# Altium PCB LV Terminal Board.PcbDoc
Units mm, origin at the board's own origin, x right, y up, seen from the top; angles counter-clockwise.
Board outline 138 x 33 mm, 2 copper layers (Top Layer, Bottom Layer); 17 components, 16 nets, 36 pads, 14 vias.
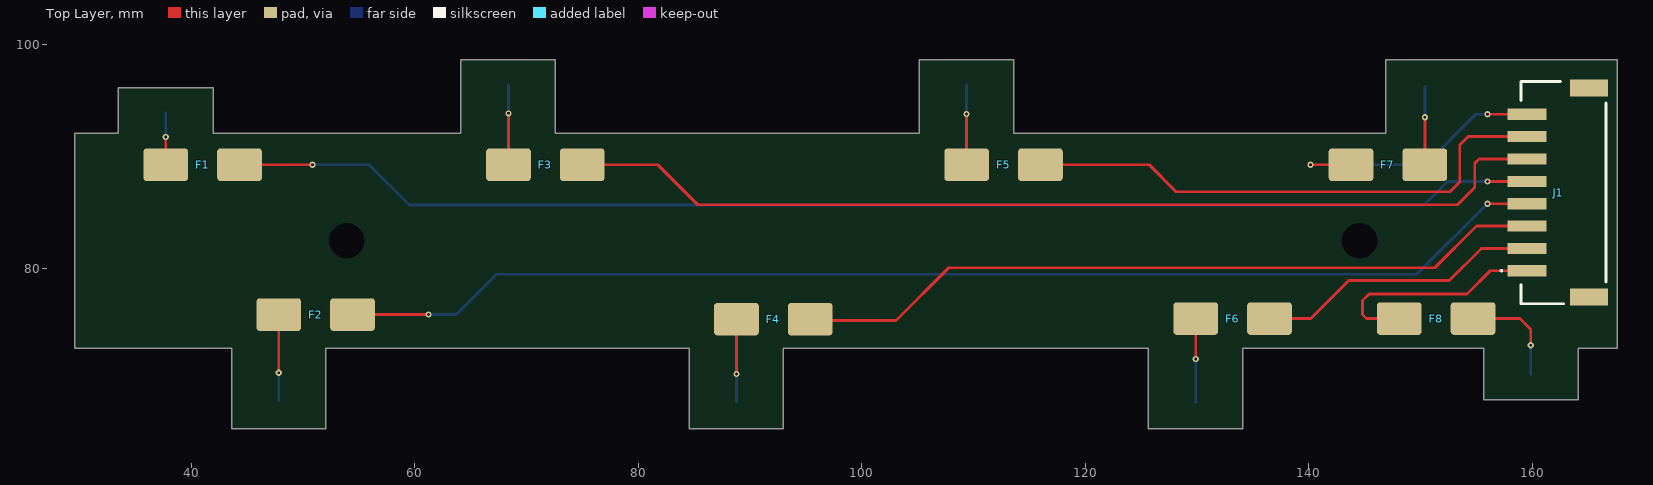
[diagram p0: Top Layer view]
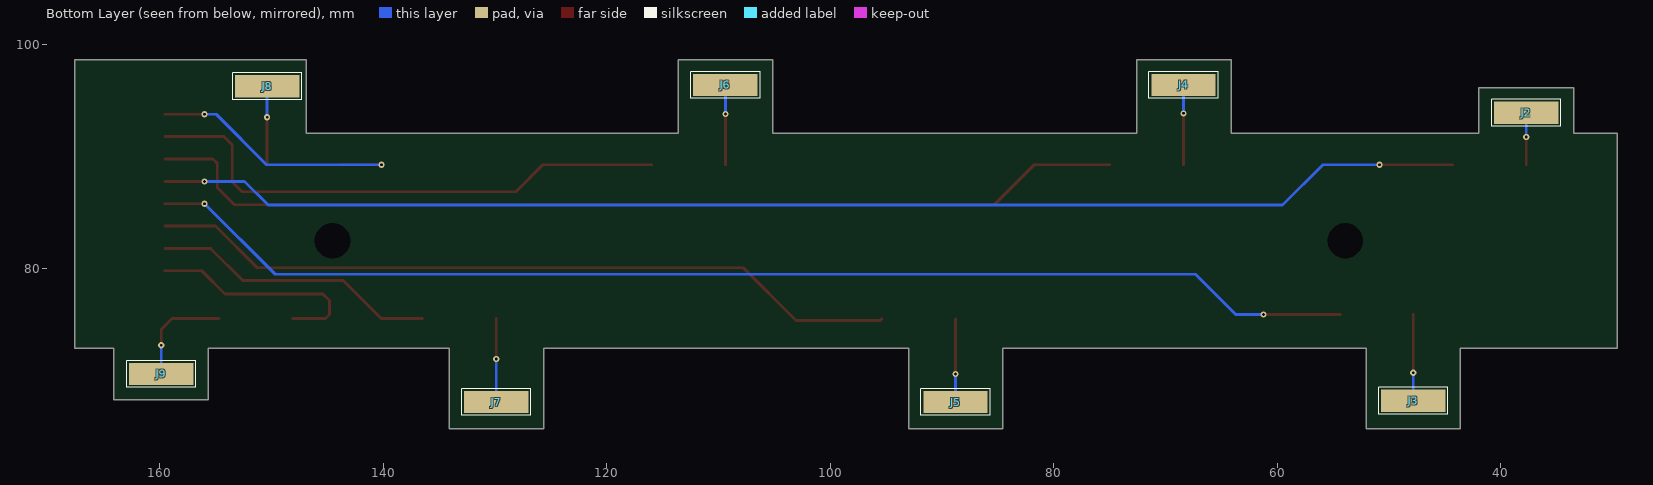
[diagram p1: Bottom Layer view, seen from below]
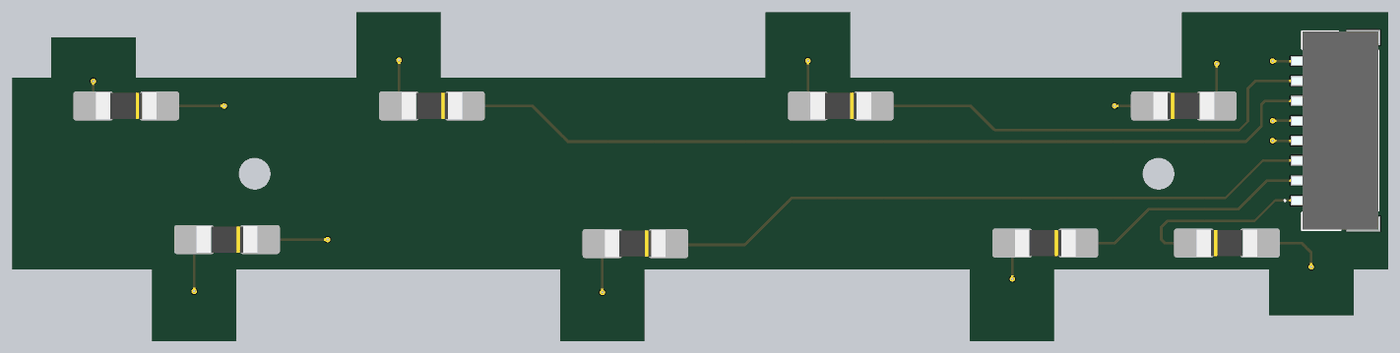
[diagram p2: 3D render of the assembled board from above, using the file's embedded part models]

## Layer stack, top to bottom
Top Solder: solder mask 0.0102, Solder Resist, Dk 3.5
Top Layer: signal copper 0.0356
Dielectric 1: dielectric 0.32, FR-4, Dk 4.8
Bottom Layer: signal copper 0.0356
Bottom Solder: solder mask 0.0102, Solder Resist, Dk 3.5

## Board outline
29.604,72.839 43.637,72.839 43.637,65.646 52.07,65.646 52.07,72.839 84.582,72.839 84.582,65.646 92.989,65.646 92.989,72.839 125.628,72.839 125.628,65.646 134.087,65.646 134.087,72.839 155.651,72.839 155.651,68.232 164.135,68.232 164.135,72.839 167.604,72.839 167.604,98.646 146.904,98.646 146.904,92.074 113.614,92.074 113.614,98.646 105.156,98.646 105.156,92.074 72.568,92.074 72.568,98.646 64.135,98.646 64.135,92.074 42.012,92.074 42.012,96.146 33.503,96.146 33.503,92.074 29.604,92.074

## Design rules (kind name [scope] priority, off if disabled: settings)
Clearance [All] p1: gap=0.254 ignorepadtopadclearanceinfootprint=FALSE
PolygonConnect [All] p1: connectstyle=Relief reliefconductorwidth=0.254 reliefentries=4 polygonreliefangle="90 Angle" airgapwidth=0.254
RoutingVias [All] p1: holewidth=0.711 width=1.27 viastyle="Through Hole" minholewidth=0.711 minwidth=1.27 maxholewidth=0.711 maxwidth=1.27
SolderMaskExpansion [All] p1: expansion=0.102 istentingtop=FALSE
Width [All] p1: maxlimit=0.254 minlimit=0.254 preferedwidth=0.254
30 further rules are at their usual default settings.

## Classes and differential pairs
component class Toplevel: F1 F2 F3 F4 F5 F6 F7 F8 J1 J2 J5 J7 J8 J9

## Components (designator, comment, footprint, x,y, rotation, side; value= is the part's Value field where it differs from the comment)
F1 "0154.750MRL" 0451Series_LTF 41.044,89.256 r180 top
F2 "0154.750MRL" 0451Series_LTF 51.154,75.844 r180 top
F3 "0154.750MRL" 0451Series_LTF 71.702,89.256 r180 top
F4 "0154.750MRL" 0451Series_LTF 92.1,75.438 r180 top
F5 "0154.750MRL" 0451Series_LTF 112.698,89.256 r180 top
F6 "0154.750MRL" 0451Series_LTF 133.196,75.489 r180 top
F7 "0154.750MRL" 0451Series_LTF 147.093,89.256 r0 top
F8 "0154.750MRL" 0451Series_LTF 151.409,75.489 r0 top
J1 "S8B-PH-SM4-TB" S8BPHSM4TB 162.789,86.766 r270 top
J2 "S9091-46R" S909146R 37.744,93.904 r0 bottom
J3 "S9091-46R" S909146R 47.854,68.148 r180 bottom
J4 "S9091-46R" S909146R 68.402,96.393 r0 bottom
J5 "S9091-46R" S909146R 88.8,68.021 r180 bottom
J6 "S9091-46R" S909146R 109.398,96.393 r180 bottom
J7 "S9091-46R" S909146R 129.896,68.021 r0 bottom
J8 "S9091-46R" S909146R 150.393,96.266 r0 bottom
J9 "S9091-46R" S909146R 159.868,70.536 r180 bottom

## Footprints (in the part's own frame and the unit in brackets; to place one, negate y for a bottom-side part, rotate by r counter-clockwise, add the part's x,y. Pads: shape width x height; smd on the part's side, far side on the other; paste and mask are expansions set on the pad)
0451Series_LTF [mm]
  rrect20% 4x2.921 smd paste+0 mask+0: 1(3.3,0) 2(-3.3,0)
  body extent -3.05,-1.35 3.05,1.35, height 2.69
S8BPHSM4TB [mm]
  rect 1x3.5 smd: 1(7,-3.25) 2(5,-3.25) 3(3,-3.25) 4(1,-3.25) 5(-1,-3.25) 6(-3,-3.25) 7(-5,-3.25) 8(-7,-3.25)
  rect 1.5x3.4 smd: MP1(9.35,2.3) MP2(-9.35,2.3)
  silkscreen extent -9.95,-5.6 9.95,3.8, body extent -9.95,-4.9 9.95,3.85, height 5.6
S909146R [mm]
  rect 5.75x2 smd: 1(0,0)
  silkscreen extent -3.1,-1.2 3.1,1.2, body extent -2.87,-1 2.87,1, height 4.33

## Part data
F1 F2 F3 F4 F5 F6 F7 F8: "FUSE BOARD MNT 750MA 125VAC/VDC", Digikey Part Number=F2576CT-ND, Manufacturer="Littelfuse Inc.", Digikey Link=https://www.digikey.com.au/en/products/detail/littelfuse-inc/0451-750MRL/700816, Part Number=0154.750MRL
J1: "Connector", Manufacturer_Name="JST (JAPAN SOLDERLESS TERMINALS)", Height=5.5mm, Manufacturer_Part_Number=S8B-PH-SM4-TB
J2 J3 J4 J5 J6 J7 J8 J9: "Connector", Manufacturer_Name=Harwin, Mouser Part Number=855-S9091-46R, Datasheet Link=https://cdn.harwin.com/pdfs/S9091R.pdf, Height=4.43mm, Manufacturer_Part_Number=S9091-46R, Mouser Price/Stock=https://www.mouser.co.uk/ProductDetail/Harwin/S9091-46R?qs=2ymmDbJkxOgQCw1a7zdQYA%3D%3D

## Free pads (board coordinates)
  round 0 hole 3.2 unplated: 2(53.924,82.448) 2(144.551,82.448)

## Via types
v1: diameter 0.55, hole 0.25, Top Layer to Bottom Layer, 14 vias

## Nets (pads, with @x,y where several pads share a name; then routed paths per layer and width w, separated by ;. In a path a pad name is that pad's centre, name@x,y a point inside that pad or via, vN(x,y) a via of type N, cw(c..) or ccw(c..) an arc to the next point about the centre after c; other vN are vias at no path point)
NetF1_1: F1.1 J2.1 | length 4.6
  Top Layer w0.254: F1.1 v1(37.744,91.745)
  Bottom Layer w0.254: v1(37.744,91.745) J2.1
NetF2_1: F2.1 J3.1 | length 7.7
  Top Layer w0.254: v1(47.854,70.637) F2.1
  Bottom Layer w0.254: J3.1 v1(47.854,70.637)
NetF3_1: F3.1 J4.1 | length 7.1
  Top Layer w0.254: F3.1 v1(68.402,93.853)
  Bottom Layer w0.254: v1(68.402,93.853) J4.1
NetF4_1: F4.1 J5.1 | length 7.4
  Top Layer w0.254: v1@88.8,70.536 F4.1
  Bottom Layer w0.254: v1(88.798,70.536) 88.798,68.023 J5.1
NetF5_1: F5.1 J6.1 | length 7.1
  Top Layer w0.254: F5.1 v1(109.398,93.802)
  Bottom Layer w0.254: v1(109.398,93.802) J6.1
NetF6_1: F6.1 J7.1 | length 7.5
  Top Layer w0.254: v1(129.896,71.882) F6.1
  Bottom Layer w0.254: J7.1 v1(129.896,71.882)
NetF7_1: F7.1 J8.1 | length 7
  Top Layer w0.254: F7.1 v1@150.393,93.472
  Bottom Layer w0.254: v1(150.393,93.497) J8.1
NetF8_1: F8.1 J9.1 | length 9.5
  Top Layer w0.254: F8.1 158.902,75.489 159.868,74.524 v1(159.868,73.101)
  Bottom Layer w0.254: J9.1 v1(159.868,73.101)
T1_F: F1.2 J1.5 | length 117.6
  Top Layer w0.254: F1.2 v1(50.876,89.256) ; v1(155.992,87.766) J1.5
  Bottom Layer w0.254: v1(50.876,89.256) 55.931,89.256 59.538,85.649 150.292,85.649 152.409,87.766 v1(155.992,87.766)
T2_F: F2.2 J1.4 | length 109.3
  Top Layer w0.254: F2.2@54.354,75.844 F2.2 v1(61.239,75.844) ; v1(155.992,85.766) J1.4
  Bottom Layer w0.254: v1(61.239,75.844) 63.729,75.844 67.335,79.451 149.677,79.451 v1(155.992,85.766)
T3_F: F3.2 J1.6 | length 89
  Top Layer w0.254: F3.2 81.763,89.256 85.344,85.674 153.314,85.674 154.864,87.224 154.864,89.383 155.248,89.766 J1.6
T4_F: F4.2 J1.3 | length 67.7
  Top Layer w0.254: F4.2 95.527,75.311 103.073,75.311 107.798,80.035 151.282,80.035 155.013,83.766 J1.3
T5_F: F5.2 J1.7 | length 48.5
  Top Layer w0.254: F5.2 125.73,89.256 128.143,86.843 152.654,86.843 153.518,87.706 153.518,91.008 154.276,91.766 J1.7
T6_F: F6.2 J1.2 | length 25.6
  Top Layer w0.254: F6.2 140.183,75.489 143.586,78.892 152.578,78.892 155.448,81.763 159.535,81.763 J1.2
T7_F: F7.2 J1.8 | length 24.9
  Top Layer w0.254: v1(140.157,89.256) F7.2 ; v1(155.992,93.766) J1.8
  Bottom Layer w0.254: v1(140.157,89.256) 150.444,89.256 154.955,93.766 v1(155.992,93.766)
T8_F: F8.2 J1.1 | length 20.5
  Top Layer w0.254: F8.2 145.186,75.489 144.831,75.844 144.831,77.114 145.415,77.699 154.178,77.699 156.246,79.766 J1.1
pads on no net: J1.MP1 J1.MP2

## Silkscreen, mask and mechanical layers (free items; w line width, h text height)
Mechanical 1:
  circle w0.013: c144.556,82.456 r1.6
  circle w0.013: c53.933,82.456 r1.6
  lines w0.254: 29.604,72.839 43.637,72.839 43.637,65.646 52.07,65.646 52.07,72.839 84.582,72.839 84.582,65.646 92.989,65.646 92.989,72.839 125.628,72.839 125.628,65.646 134.087,65.646 134.087,72.839 155.651,72.839 155.651,68.232 164.135,68.232 164.135,72.839 167.604,72.839 167.604,98.646 153.904,98.646 146.904,98.646 146.904,92.074 113.614,92.074 113.614,98.646 105.156,98.646 105.156,92.074 72.568,92.074 72.568,98.646 64.135,98.646 64.135,92.074 42.012,92.074 42.012,96.146 33.503,96.146 33.503,92.074 29.604,92.074 29.604,72.839